# Altium PCB 电源管理.PcbDoc
Units mil, origin at the board's own origin, x right, y up, seen from the top; angles counter-clockwise.
Board outline 3460 x 1175 mil, 2 copper layers (Top Layer, Bottom Layer); 65 components, 72 nets, 244 pads, 82 vias.
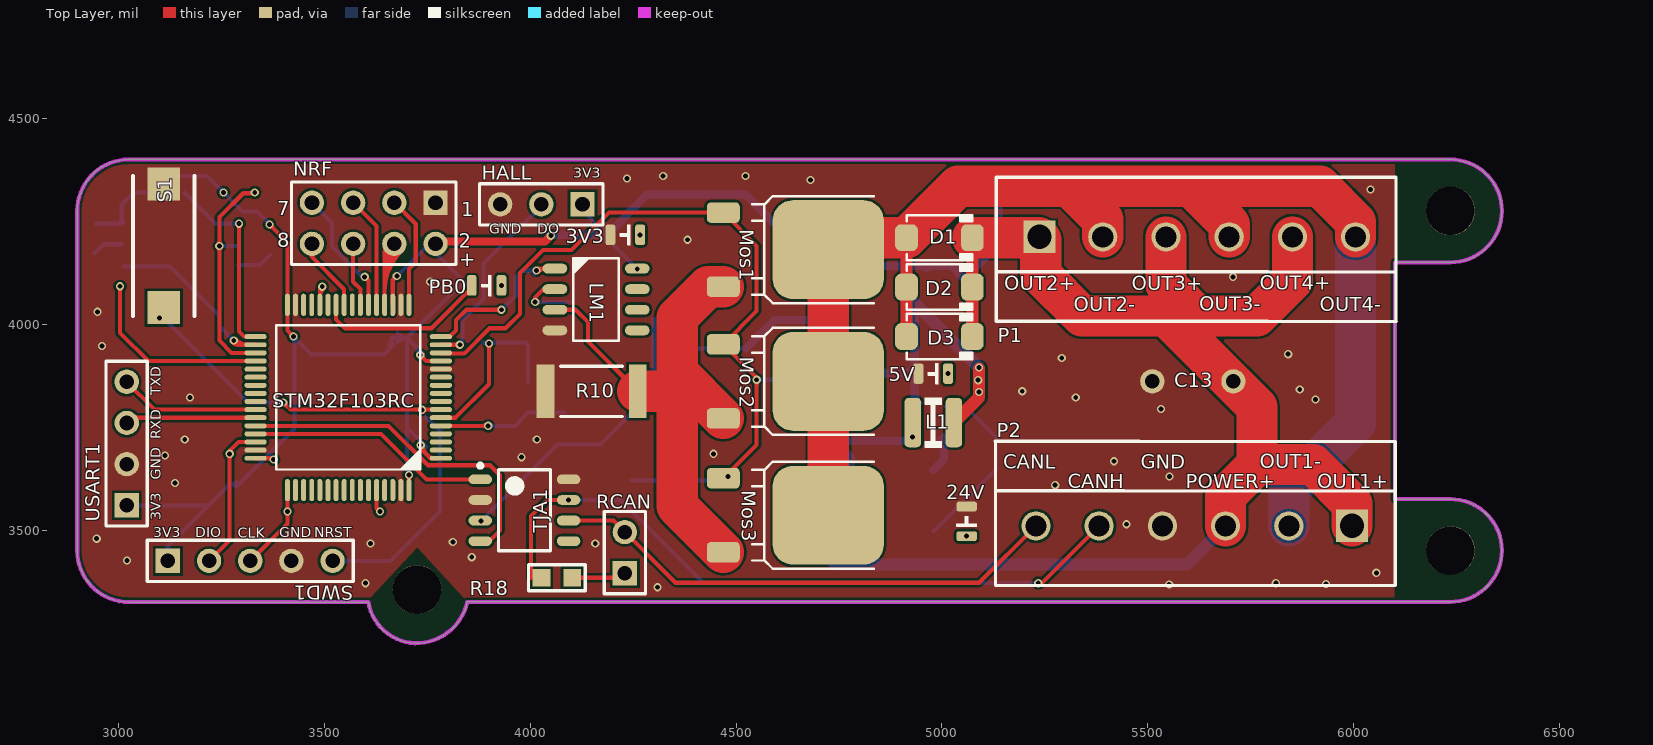
[diagram p0: Top Layer view]
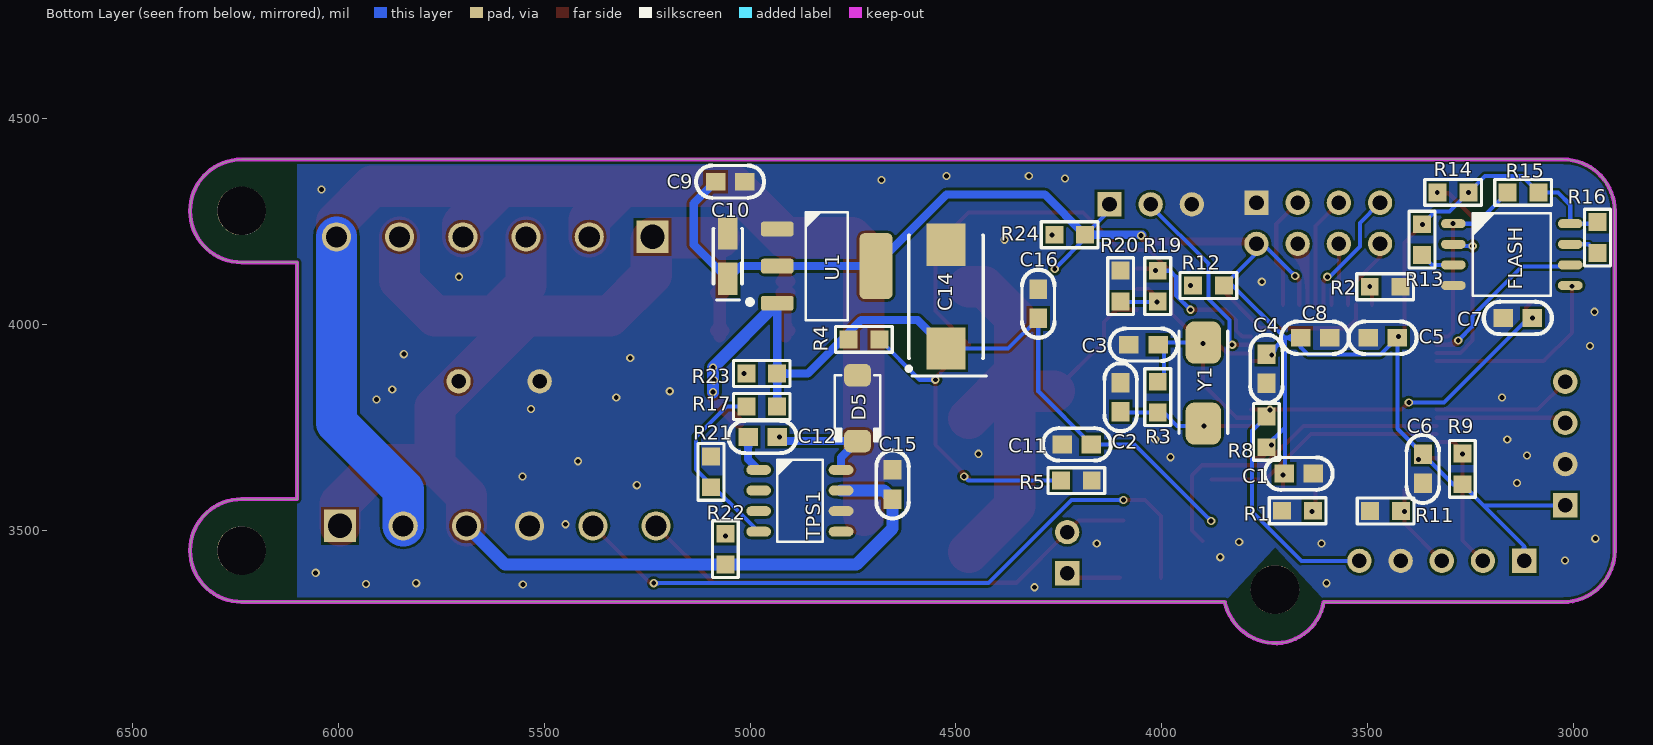
[diagram p1: Bottom Layer view, seen from below]
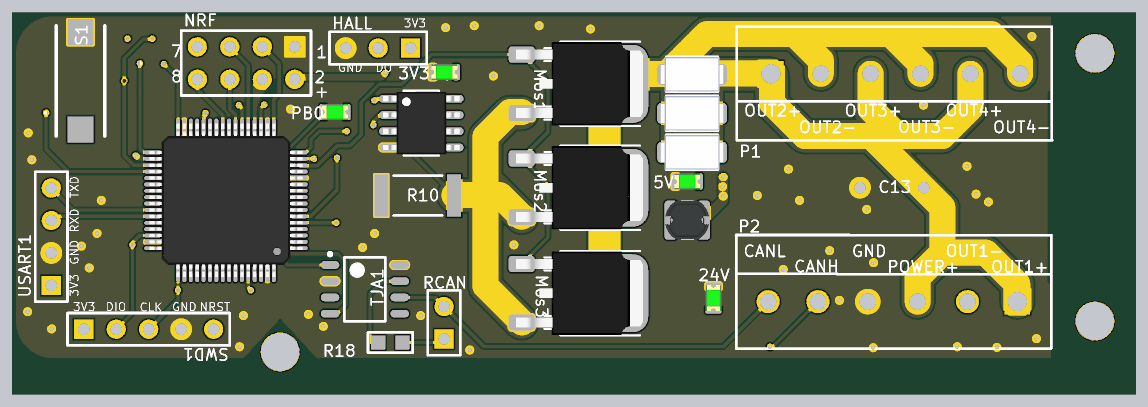
[diagram p2: 3D render of the assembled board from above, using the file's embedded part models]

## Layer stack, top to bottom
Top Layer: signal copper 1.4
Dielectric: dielectric 12.6, FR-4, Dk 4.8
Bottom Layer: signal copper 1.4

## Board outline
3025,3325 cw(c3025,3450) 2900,3450 2900,4275 cw(c3025,4275) 3025,4400 6235,4400 cw(c6235,4275) 6360,4275 cw(c6235,4275) 6235,4150 6100,4150 6100,3575 6235,3575 cw(c6235.15,3450.15) 6360,3450.31 cw(c6235.15,3450.46) 6235,3325.61 3847.16,3325.61 cw(c3722.5,3352.5) 3720,3225 3720,3225.1 cw(c3725,3345) 3606.67,3325.03 3606.51,3325

## Design rules (kind name [scope] priority, off if disabled: settings)
Clearance [All] p1: gap=6
PolygonConnect [All] p1: connectstyle=Direct reliefconductorwidth=10 reliefentries=4 polygonreliefangle="90 Angle" airgapwidth=10
RoutingVias [All] p1: holewidth=12 width=20 viastyle="Through Hole" minholewidth=12 minwidth=20 maxholewidth=150 maxwidth=150
SolderMaskExpansion [All] p1: expansion=4
Width [All] p1: maxlimit=100 minlimit=10 preferedwidth=10
28 further rules are at their usual default settings.

## Components (designator, comment, footprint, x,y, rotation, side; value= is the part's Value field where it differs from the comment)
3V3 "LED_0603" LED_0805_GREEN 4231,4217 r180 top (schematic designator D8)
5V "LED_0603" LED_0805_GREEN 4979,3880 r180 top (schematic designator D7)
24V "LED_0603" LED_0805_GREEN 5060,3521 r90 top (schematic designator D6)
C1 "Cap" CAP-MLCC-0603 3703,3637 r180 bottom
C2 "Cap" CAP-MLCC-0603 4100,3858 r270 bottom
C3 "Cap" CAP-MLCC-0603 4080,3950 r180 bottom
C4 "Cap" CAP-MLCC-0603 3746,3927 r270 bottom
C5 "Cap" CAP-MLCC-0603 3428,3967 r0 bottom
C6 "Cap" CAP-MLCC-0603 3366,3684 r270 bottom
C7 "Cap" CAP-MLCC-0603 3100,4015 r0 bottom
C8 "Cap" CAP-MLCC-0603 3663,3967 r180 bottom
C9 "Cap" CAP-MLCC-0603 5013,4346 r0 bottom
C10 "100μF" CAP-TAN-3216/CAPA 5054,4110 r270 bottom
C11 "Cap" CAP-MLCC-0603 4171,3708 r0 bottom
C12 "Cap" CAP-MLCC-0603 4934,3726 r0 bottom
C13 "100μF" C5 5708,3861 r180 top
C14 "220μF" CAP-TAN-7343/CAPD 4524,3941 r90 bottom
C15 "Cap" CAP-MLCC-0603 4654,3646 r270 bottom
C16 "Cap" CAP-MLCC-0603 4300,4085 r270 bottom
D1 "SS34" DO-214AC 4994,4210 r0 top
D2 "SS34" DO-214AC 4994,4090 r0 top
D3 "SS34" DO-214AC 4994,3970 r0 top
D5 "SS34" DO-214AC 4739,3796 r270 bottom
FLASH "SST25VF064" SOIC_E200_8 3150,4169 r180 bottom
HALL "Header 3" HDR1X3 4127,4291 r180 top
L1 "Inductor" IND_CD32 4979,3761 r0 top
LM1 "LM358" SOP_E150_8 4160,4060 r0 top
Mos1 "MOSFET N" TO-252AA 4469,4271 r270 top
Mos2 "MOSFET N" TO-252AA 4469,3951 r270 top
Mos3 "MOSFET N" TO-252AA 4469,3626 r270 top
NRF "NRF24L01" HDR2X4 3770,4295 r180 top
P1 "GREEN6" Green_6P 5312,4307 r0 top
P2 "GREEN6" Green_6P 5921,3415 r180 top
PB0 "LED_0603" LED_0805_GREEN 3894,4094 r180 top (schematic designator D4)
R1 "Res_0603" RES-0603 3633,3547 r0 bottom
R2 "Res_0603" RES-0603 3495,4091 r180 bottom
R3 "Res_0603" RES-0603 4010,3860 r270 bottom
R4 "Res_0603" RES-0603 4686,3963 r0 bottom
R5 "Res_0603" RES-0603 4170,3620 r0 bottom
R8 "Res_0603" RES-0603 3746,3776 r270 bottom
R9 "Res_0603" RES-0603 3270,3686 r270 bottom
R10 "Res_0603" RESC6332 4149,3837 r0 top
R11 "Res_0603" RES-0603 3494,3546 r180 bottom
R12 "Res_0603" RES-0603 3924,4094 r180 bottom
R13 "Res_0603" RES-0603 3368,4168 r90 bottom
R14 "Res_0603" RES-0603 3330,4320 r180 bottom
R15 "Res_0603" RES-0603 3160,4320 r180 bottom
R16 "Res_0603" RES-0603 2942,4173 r90 bottom
R17 "Res_0603" RES-0603 5009,3800 r180 bottom
R18 "Res_0603" RES-0603 4102,3384 r180 top
R19 "Res_0603" RES-0603 4010,4055 r90 bottom
R20 "Res_0603" RES-0603 4100,4130 r270 bottom
R21 "Res_0603" RES-0603 5095,3604 r90 bottom
R22 "Res_0603" RES-0603 5060,3491 r270 bottom
R23 "Res_0603" RES-0603 5009,3880 r180 bottom
R24 "Res_0603" RES-0603 4261,4217 r180 bottom
RCAN "" HDR1X2 4230,3395 r90 top
S1 "SW-PB" KEY_SMD 3105,4195 r90 top
STM32F103RC "STM32F103RC" LQFP_P0.5_64 3558,3822 r180 top
SWD1 "Header 5" HDR1X5 3120,3425 r0 top
TJA1 "TJA1050" TJA1050 3986,3548 r0 top
TPS1 "TPS54300" SOP_E150_8 4879,3571 r180 bottom
U1 "AMS1117" SOT223-3 4814,4141 r270 bottom
USART1 "Header 4" HDR1X4 3020,3560 r90 top
Y1 "8M" Osc-6032 3899,3857 r270 bottom

## Footprints (in the part's own frame and the unit in brackets; to place one, negate y for a bottom-side part, rotate by r counter-clockwise, add the part's x,y. Pads: shape width x height; smd on the part's side, far side on the other; paste and mask are expansions set on the pad)
C5 [mm]
  round 1.5 hole 0.9: 1(0,0) 2(5,0)
CAP-MLCC-0603 [mm]
  rect 1.2x1.1 smd: 1(0,0) 2(1.8,0)
  silkscreen extent -1.2,-1 3,1, body extent 0.02,-0.48 1.77,0.47, height 0.85
CAP-TAN-3216/CAPA [mm]
  rect 2x1.2 smd: 1(0,0) 2(-2.8,0)
  silkscreen extent -3.1,-0.9 1.45,1.37
CAP-TAN-7343/CAPD [mm]
  rect 2.6x2.4 smd: 1(0,0) 2(6.4,0)
  silkscreen extent -1.7,-2.5 7,2.43
DO-214AC [mil] "SMA"
  rrect50% 55x65 smd: 1(-80,0) 2(80,0)
  silkscreen extent -80,-55 80,55, body extent -98,-53 98,53, height 85
Green_6P [mm]
  rect 2x2 hole 1.5: 1(-1.905,-2.413)
  round 1.8 hole 1.3: 2(1.995,-2.413) 3(5.895,-2.413) 4(9.795,-2.413) 5(13.695,-2.413) 6(17.595,-2.413)
  silkscreen extent -4.57,-7.63 20.12,1.27
HDR1X2 [mm] "Connector; Header; 2 Position"
  rect 1.5x1.5 hole 0.9: 1(0,0)
  round 1.5 hole 0.9: 2(2.54,0)
  silkscreen extent -1.27,-1.27 3.81,1.27
HDR1X3 [mm] "Connector; Header; 3 Position"
  rect 1.5x1.5 hole 0.9: 1(0,0)
  round 1.5 hole 0.9: 2(2.54,0) 3(5.08,0)
  silkscreen extent -1.27,-1.27 6.35,1.27
HDR1X4 [mm] "Connector; Header; 4 Position"
  rect 1.5x1.5 hole 0.9: 1(0,0)
  round 1.5 hole 0.9: 2(2.54,0) 3(5.08,0) 4(7.62,0)
  silkscreen extent -1.27,-1.27 8.89,1.27
HDR1X5 [mm] "Connector; Header; 5 Position"
  rect 1.5x1.5 hole 0.9: 1(0,0)
  round 1.5 hole 0.9: 2(2.54,0) 3(5.08,0) 4(7.62,0) 5(10.16,0)
  silkscreen extent -1.27,-1.27 11.43,1.27
HDR2X4 [mm] "Connector; Header; 4x2 Position"
  rect 1.5x1.5 hole 0.9: 1(0,0)
  round 1.5 hole 0.9: 2(0,2.54) 3(2.54,0) 4(2.54,2.54) 5(5.08,0) 6(5.08,2.54) 7(7.62,0) 8(7.62,2.54)
  silkscreen extent -1.27,-1.27 8.89,3.81
IND_CD32 [mil]
  rrect50% 40x120 smd: 1(-50,0) 2(50,0)
  silkscreen extent -20,-60 20,60, body extent -68,-59 68,59, height 83
KEY_SMD [mil]
  rect 80x80 smd: 1(-155,-5) 2(145,-5)
  silkscreen extent -175,-80 165,70
LED_0805_GREEN [mil]
  rrect50% 24x50 smd: 1(-36,0) 2(36,0)
  silkscreen extent -12,-24 12,24, body extent -40,-25 40,25, height 43
LQFP_P0.5_64 [mil]
  oval 54x12 smd: 1(-225,147.64) 2(-225,127.95) 3(-225,108.27) 4(-225,88.58) 5(-225,68.9) 6(-225,49.21) 7(-225,29.53) 8(-225,9.84) 9(-225,-9.84) 10(-225,-29.53) 11(-225,-49.21) 12(-225,-68.9) 13(-225,-88.58) 14(-225,-108.27) 15(-225,-127.95) 16(-225,-147.64) 33(225,-147.64) 34(225,-127.95) 35(225,-108.27) 36(225,-88.58) 37(225,-68.9) 38(225,-49.21) 39(225,-29.53) 40(225,-9.84) 41(225,9.84) 42(225,29.53) 43(225,49.21) 44(225,68.9) 45(225,88.58) 46(225,108.27) 47(225,127.95) 48(225,147.64)
  oval 12x54 smd: 17(-147.64,-225) 18(-127.95,-225) 19(-108.27,-225) 20(-88.58,-225) 21(-68.9,-225) 22(-49.21,-225) 23(-29.53,-225) 24(-9.84,-225) 25(9.84,-225) 26(29.53,-225) 27(49.21,-225) 28(68.9,-225) 29(88.58,-225) 30(108.27,-225) 31(127.95,-225) 32(147.64,-225) 49(147.64,225) 50(127.95,225) 51(108.27,225) 52(88.58,225) 53(68.9,225) 54(49.21,225) 55(29.53,225) 56(9.84,225) 57(-9.84,225) 58(-29.53,225) 59(-49.21,225) 60(-68.9,225) 61(-88.58,225) 62(-108.27,225) 63(-127.95,225) 64(-147.64,225)
  silkscreen extent -175,-175 175,175, body extent -236,-236 236,236, height 59
Osc-6032 [mm]
  rrect50% 2.6x2.2 smd: 1(-2.5,0) 2(2.5,0)
  silkscreen extent -3.2,-1.5 3.1,1.5
RES-0603 [mm]
  rect 1.1x1.1 smd: 1(0,0) 2(1.9,0)
  silkscreen extent -0.8,-0.8 2.7,0.8, body extent 0.1,-0.48 1.8,0.47, height 0.6
RESC6332 [mm] "Chip Resistor, Body 6.3x3.2mm, IPC High Density"
  rect 1.1x3.3 smd: 1(-2.85,0) 2(2.85,0)
  silkscreen extent -1.9,-1.55 1.9,1.55, body extent -3.22,-1.68 3.22,1.68, height 0.9
SOIC_E200_8 [mil]
  oval 60x22 smd: 1(-142,75) 2(-142,25) 3(-142,-25) 4(-142,-75) 5(142,-75) 6(142,-25) 7(142,25) 8(142,75)
  silkscreen extent -95,-100 95,100, body extent -161,-106 161,106, height 84
SOP_E150_8 [mil]
  oval 60x24 smd: 1(-100,75) 2(-100,25) 3(-100,-25) 4(-100,-75) 5(100,-75) 6(100,-25) 7(100,25) 8(100,75)
  silkscreen extent -55,-100 55,100, body extent -118,-96 118,96, height 69
SOT223-3 [mil]
  rrect40% 36x80 smd: 1(-90.16,-120) 2(0,-120) 3(90.16,-120)
  rrect30% 160x80 smd: 4(0,120)
  silkscreen extent -131,-51 131,51, body extent -132,-144 132,144, height 71
TJA1050 [mm] "SOIC, 8-Leads, Body 4.90x3.90mm, Pitch 1.27mm, IPC Medium Density"
  oval 1.45x0.6 smd: 1(-2.725,1.905) 2(-2.725,0.635) 3(-2.725,-0.635) 4(-2.725,-1.905) 5(2.725,-1.905) 6(2.725,-0.635) 7(2.725,0.635) 8(2.725,1.905)
  silkscreen extent -2.85,-2.5 1.6,2.88, body extent -2,-2.5 2,2.5, height 1.75
TO-252AA [mil]
  rrect40% 50x80 smd: 1(0,0) 3(180,0)
  rrect40% 240x270 smd: 4(90,255)
  silkscreen extent -40,70 220,365, body extent -39,-17 219,374, height 91

## Part data
3V3 5V 24V PB0: "LED"
C1 C2 C3 C4 C5 C6 C8: library part Cap_1, "Capacitor"
C7 C9 C11 C12 C15 C16: "Capacitor"
C10 C13 C14: library part CAP-TAN, "钽电容"
D1 D2 D3 D5: library part DIODE-Schottky, "肖特基二极管"
FLASH LM1: library part Component_1
HALL: "Header, 3-Pin"
Mos1 Mos2 Mos3: "MOS SOT23"
NRF: library part MHDR2X4, "Header, 4-Pin, Dual row"
P1 P2: library part "Header 6", "Header, 6-Pin"
R1 R2 R3 R4 R5 R8 R9 R10 R11 R12 R13 R14 R15 R16 R17 R18 R19 R20 R21 R22 R23 R24: "Resistor"
RCAN: library part "Header 2", "Header, 2-Pin"
S1: "按钮"
STM32F103RC: "MCU"
SWD1: "Header, 5-Pin"
TJA1: "CAN总线收发器"
U1: library part AMS１１１７
USART1: "Header, 4-Pin"
Y1: library part C-Osc, "Crystal Oscillator"

## Free pads (board coordinates)
  round 118.11 hole 118.11: 7(6235,4275) 8(6235,3450) 9(3725,3355)

## Via types
v1: diameter 20, hole 12, Top Layer to Bottom Layer, 80 vias
v2: diameter 20, hole 12, Top Layer to Bottom Layer, tented bottom, 1 vias
v3: diameter 20, hole 12, Top Layer to Bottom Layer, tented top, 1 vias

## Nets (pads, with @x,y where several pads share a name; then routed paths per layer and width w, separated by ;. In a path a pad name is that pad's centre, name@x,y a point inside that pad or via, vN(x,y) a via of type N, cw(c..) or ccw(c..) an arc to the next point about the centre after c; other vN are vias at no path point)
3V3: C1.1 C4.1 C5.1 C6.1 C8.1 C9.2 C10.1 FLASH.8 HALL.1 LM1.8 NRF.2 R8.2 R9.2 R12.2 R13.2 R14.2 R15.2 R16.2 R24.2 STM32F103RC.1 STM32F103RC.13 STM32F103RC.19 STM32F103RC.32 STM32F103RC.48 STM32F103RC.64 SWD1.1 U1.2 U1.4 USART1.1 | length 5744
  Top Layer w10: STM32F103RC.48 3373.64,3674.36 v1(3377,3671) ; v1@3367,4237 cw(c3367,4224.93) 3375.54,4233.46 cw(c3384.07,4242) v1@3372,4242 ; v1(3367,4242) 3410.36,4198.64 STM32F103RC.32 3410.36,3984.64 v1(3425,3970) ; v1@3420,3970 ccw(c3407.93,3970) 3416.46,3978.54 ccw(c3425,3987.07) v1@3425,3975 ; STM32F103RC.19 3666.27,4107.27 v1(3676,4117) ; v1@3671,4117 cw(c3658.93,4117) 3667.46,4108.46 cw(c3676,4099.93) v1@3676,4112 ; v1@3702.1,3630.1 cw(c3693.57,3621.57) 3705.64,3621.57 cw(c3717.71,3621.57) v1@3709.17,3630.1 ; STM32F103RC.64 v1(3705.64,3633.64) ; v1@3733,3920 cw(c3733,3907.93) 3741.54,3916.46 cw(c3750.07,3925) v1@3738,3925 ; v1(3733,3925) 3747.42,3910.58 STM32F103RC.13 ; v1(3734,3706) 3734,3698.01 3757.64,3674.36 STM32F103RC.1 ; v1@3739,3706 ccw(c3770.37,3706) 3748.19,3683.82 ; 3752.86,3679.15 ccw(c3762,3688.29) STM32F103RC.1@3762,3675.36
  Top Layer w20: NRF.2 3776,4201 4036,4201 v1(4050,4215)
  Bottom Layer w10: R16.2@2945.8,4244 FLASH.8 3008,4290 3038,4320 R15.2 3125.2,4360 3215.2,4360 R14.2 3301.2,4274 3336.8,4274 R13.2 ; FLASH.8@3003.76,4248.24 ccw(c2993.51,4258.49) 3008,4258.49 ccw(c3022.49,4258.49) FLASH.8@3012.24,4248.24 ; USART1.1 3218.8,3560 ; SWD1.1@3110.91,3447.78 ccw(c3105.56,3461.2) 3120,3461.2 ; SWD1.1 3120,3461.2 ; SWD1.1@3129.09,3447.78 cw(c3134.44,3461.2) 3120,3461.2 ; R14.2@3246.33,4328.87 cw(c3237.45,4320) R14.2@3250,4320 ; R14.2@3246.8,4328.4 ccw(c3255,4336.6) R14.2@3255,4325 ; R14.2@3255,4315 cw(c3255,4302.45) R14.2@3263.87,4311.33 ; R14.2@3260,4320 ccw(c3271.6,4320) R14.2@3263.4,4311.8 ; R9.2@3285.78,3605.87 cw(c3293.2,3603.37) 3293.2,3611.2 ; R9.2@3285.78,3616.52 ccw(c3293.2,3619.02) 3293.2,3611.2 ; R13.2@3357.19,4253.61 cw(c3345.58,4242) R13.2@3362,4242 ; C5.1@3421.46,3966.46 cw(c3405.69,3950.69) C5.1@3428,3950.69 ; C5.1@3425,3965 cw(c3425,3952.93) 3433.54,3961.46 cw(c3442.07,3970) C5.1@3430,3970 ; C8.1@3657.8,3951.18 cw(c3655.45,3944) 3663,3944 ; C8.1@3668.2,3951.18 ccw(c3670.55,3944) 3663,3944 ; v1(3676,4117) 3754,4195 NRF.2 3770,4173.2 R12.2 3828,4094 3701,3967 ; v1@3676,4122 ccw(c3676,4134.07) 3684.54,4125.54 ccw(c3693.07,4117) v1@3681,4117 ; C8.1@3677.65,3956.21 cw(c3701,3936.35) 3701,3967 ; C8.1@3677.65,3977.79 ccw(c3701,3997.65) 3701,3967 ; C1.1@3701,3639 3701,3749.2 ; C1.1@3701,3656.91 ccw(c3728.91,3656.91) C1.1@3709.17,3637.17 ; 3717.39,3950.61 cw(c3691.79,3925) C4.1@3728,3925 ; R8.2@3737.43,3702.36 cw(c3742.63,3696.83) 3748,3702.2 3701,3749.2 ; C4.1@3741,3927 3701,3967 ; HALL.1@4127,4276.2 R24.2 4186.2,4207.8 v1(4260,4134) ; v1@4255,4134 ccw(c4242.93,4134) 4251.46,4142.54 ccw(c4260,4151.07) v1@4260,4139 ; 3120,3461.2 3218.8,3560 ; 3218.8,3560 R9.2 3293.2,3611.2 ; 3293.2,3611.2 C6.1 3428,3746 C5.1 3469,3926 3645,3926 3663,3944 ; 3663,3944 C8.1 3701,3967 ; 3701,3749.2 3701,3967
  Bottom Layer w20: v1@4047,4217 R24.2 4284.2,4315 4523.02,4315 4694,4144.02 U1.4 U1.2 5023,4141 ; R24.2@4177.96,4208.76 ccw(c4158.06,4188.87) 4158.06,4217 ccw(c4158.06,4245.13) R24.2@4177.96,4225.24 ; U1.2@4906.34,4135.34 ccw(c4892.69,4121.69) 4892.69,4141 ccw(c4892.69,4160.31) U1.2@4906.34,4146.66 ; U1.2@4961.66,4135.34 cw(c4975.31,4121.69) 4975.31,4141 cw(c4975.31,4160.31) U1.2@4961.66,4146.66 ; C10.1@5047.34,4137.63 cw(c5037.4,4155.39) 5023,4141 ; C9.2 5137,4292.87 5137,4193 C10.1 5023,4141
  other v1: 3255,4320
5V: C11.1 C14.1 C16.2 L1.2 R4.2 R17.2 R23.2 TJA1.3 U1.3 | length 2387.8
  Top Layer w30: L1.2 5090,3822 v1@5090,3892
  Bottom Layer w10: v1(3880,3522) 4066,3708 C11.1 4300,3837 C16.2 4373.13,3941 C14.1 ; v1@3880,3527 ccw(c3880,3539.07) 3888.54,3530.54 ccw(c3897.07,3522) v1@3885,3522
  Bottom Layer w20: C14.1 4592.8,4009.8 4730,4009.8 4797.8,3942 4859.8,3880 R23.2 ; R17.2@4925.96,3808.24 ccw(c4906.06,3828.13) 4934.2,3828.13 ccw(c4962.33,3828.13) R17.2@4942.44,3808.24 ; U1.3@4928.34,4045.19 cw(c4914.21,4031.05) 4934.2,4031.05 ; R17.2 R23.2 ; 4934.2,4032 cw(c4952.84,4032) U1.3@4939.66,4045.19 ; U1.3@4934.2,4050.65 R23.2 ; R23.2@4942.44,3871.76 ccw(c4962.33,3851.87) 4934.2,3851.87 ccw(c4906.06,3851.87) 4925.96,3871.76 ccw(c4906.06,3851.87) 4906.06,3880 ccw(c4906.06,3908.13) 4925.96,3888.24 ccw(c4906.06,3908.13) 4934.2,3908.13 ccw(c4962.33,3908.13) R23.2@4942.44,3888.24
  Bottom Layer w30: U1.3 4934.2,4050.65 v1(5090,3894.84) v1(5090,3835)
  other v1: 5088,3864
ADC2: LM1.1 R19.2 STM32F103RC.16 | length 469.9
  Top Layer w10: STM32F103RC.16 3804.64,3969.64 3820,3985 3820,4010 3845,4035 v1(3930,4035) ; v1@3926.46,4031.46 ccw(c3917.93,4022.93) 3917.93,4035 ccw(c3917.93,4047.07) v1@3926.46,4038.54 ; v1(4015,4130) 4020,4135 LM1.1 ; v1@4018.54,4126.46 cw(c4039.14,4105.86) LM1.1@4039.14,4135
  Bottom Layer w10: v1(3930,4035) 3965,4070 3965,4115 3979.8,4129.8 R19.2 R19.2@4010,4121.14 ; v1@3930,4040 ccw(c3930,4052.07) 3938.54,4043.54 ccw(c3947.07,4035) v1@3935,4035 ; R19.2@4002.45,4129.8 ccw(c4002.45,4142.55) R19.2@4011.46,4133.54 ; R19.2@4003.4,4129.8 cw(c4003.4,4118.4) R19.2@4011.46,4126.46
BOOT0: R1.1 STM32F103RC.60 | length 72.8
  Top Layer w10: STM32F103RC.60 3626.9,3553.1 ; v1@3630,3545.19 ccw(c3619.38,3545.59) 3626.9,3553.1 ; v1@3634.81,3550 cw(c3634.41,3560.62) 3626.9,3553.1 ; v1(3635,3545) 3626.9,3553.1
BOOT1: R2.1 STM32F103RC.28 | length 71.7
  Top Layer w10: STM32F103RC.28 3489.1,4085.1 v1(3495,4091) ; STM32F103RC.28@3489.1,4064.69 cw(c3521.31,4064.69) v1@3498.54,4087.46
CAN_H: P2.5 R18.2 TJA1.7 | length 1745.1
  Top Layer w10: 4002,3384 4002,3534 4041,3573 v1(4093.28,3573) ; TJA1.7@4089.75,3569.46 ccw(c4081.21,3560.93) 4081.21,3573 ccw(c4081.21,3585.07) TJA1.7@4089.75,3576.54 ; v1(5234,3371) 5242.83,3371 P2.5
  Bottom Layer w10: v1(4093.28,3573) 4219,3573 4421,3371 v1(5234,3371) v1@5235,3371 ; v1@4096.82,3569.46 cw(c4105.35,3560.93) 4105.35,3573 cw(c4105.35,3585.07) v1@4096.82,3576.54 ; v1@5230.46,3367.46 ccw(c5221.93,3358.93) 5221.93,3371 ccw(c5221.93,3383.07) v1@5230.46,3374.54
CAN_L: P2.6 RCAN.2 TJA1.6 | length 1254.7
  Top Layer w10: TJA1.6 4202,3523 RCAN.2 4353,3372 5090.28,3372 P2.6
CAN_RX: STM32F103RC.44 TJA1.4 | length 814.5
  Top Layer w10: STM32F103RC.44 3656.28,3753.1 3752.02,3657.36 3902.64,3657.36 3927,3633 3927,3499 TJA1.4@3901,3473
CAN_TX: STM32F103RC.45 TJA1.1 | length 591.5
  Top Layer w10: STM32F103RC.45 3637.58,3733.42 3748,3623 TJA1.1
DO: HALL.2 STM32F103RC.15 | length 484
  Top Layer w10: STM32F103RC.15 v1(3829,3950) v1(3829,3950) ; 3816.81,3949.95 ccw(c3816.81,3962.19) v1@3825.46,3953.54 ; 3817.04,3949.95 cw(c3817.04,3938.04) v1@3825.46,3946.46
  Bottom Layer w10: v1(3829,3950) 3836,3957 3836,4010 3887,4061 3887,4147 HALL.2@4027,4287
GND: 3V3.2 5V.2 24V.2 C1.2 C2.1 C3.1 C4.2 C5.2 C6.2 C7.2 C8.2 C9.1 C10.2 C11.2 C13.2 C14.2 C15.1 C16.1 D5.1 FLASH.4 HALL.3 LM1.4 NRF.1 P2.4 R1.2 R2.2 R5.1 R10.1 R11.1 R20.1 R21.2 S1.2 STM32F103RC.12 STM32F103RC.18 STM32F103RC.31 STM32F103RC.47 STM32F103RC.63 SWD1.4 TJA1.2 TJA1.8 TPS1.6 U1.1 USART1.2
  other v1: 4309,3361 5552,3368 5933,3369 3600,3371 5811,3371 6055,3396 3021,3426 3858,3434 3612,3467 4158,3467 3812,3471 2947,3479 5448,3514 5275,3609 3137,3614 5553,3630 5418,3667 3979,3677 3113,3681 4445,3685 3161,3720 4016,3720 5532,3794 5907,3817 3174,3822 5325,3822 5195,3837 5869,3841 5291,3918 5841,3927 2960,3947 2949,4030 3757,4103 5707,4115 4382,4205 6041,4327 4681,4350 4235,4354 4323,4360 4523,4360
IRQAM: NRF.8 STM32F103RC.25 | length 202.9
  Top Layer w10: NRF.8@3463.63,4171.31 cw(c3461.39,4163) 3470,4163 ; NRF.8 3470,4163 ; NRF.8@3476.37,4171.31 ccw(c3478.61,4163) 3470,4163 ; STM32F103RC.25 3548.16,4084.84 3470,4163
MOTER+: C13.1 C15.2 D1.2 D2.2 D3.2 P1.1 P1.3 P1.5 P2.1 P2.3 R22.2 TPS1.7 | length 3965.5
  Top Layer w30: D3.2@5065.16,3983.84 ccw(c5043.82,4005.18) 5074,4005.18 ccw(c5104.18,4005.18) D3.2@5082.84,3983.84 ; D2.2@5065.16,4076.16 cw(c5043.82,4054.82) 5074,4054.82 cw(c5104.18,4054.82) D2.2@5082.84,4076.16 ; D2.2@5065.16,4103.84 ccw(c5043.82,4125.18) 5074,4125.18 ccw(c5104.18,4125.18) D2.2@5082.84,4103.84 ; D1.2@5065.16,4196.16 cw(c5043.82,4174.82) 5074,4174.82 cw(c5104.18,4174.82) D1.2@5082.84,4196.16 ; D3.2 D2.2 D1.2
  Top Layer w100: D1.2 P1.1@5235,4210 ; P1.1@5240,4205 5240,4120 5340,4020 5544,4020 ; P1.3 5544.09,4095.91 5620,4020 ; P2.3 5688.91,3582.91 5765,3659 ; P1.5 5851.17,4106.17 5765,4020 5620,4020 ; P2.1 5996,3564 5901,3659 5765,3659 ; 5544,4020 5620,4020 ; 5544,4020 5765,3799 5765,3659
  Bottom Layer w30: TPS1.7 4674.87,3596 C15.2 4654,3504 4741.8,3416.2 R22.2 5595.11,3416.2 P2.3
MOTER-: D1.1 D2.1 D3.1 Mos1.4 Mos2.4 Mos3.4 P1.2 P1.4 P1.6 P2.2 | length 3575.8
  Top Layer w30: D3.1@4905.16,3983.84 ccw(c4883.82,4005.18) 4914,4005.18 ccw(c4944.18,4005.18) D3.1@4922.84,3983.84 ; D2.1@4905.16,4076.16 cw(c4883.82,4054.82) 4914,4054.82 cw(c4944.18,4054.82) D2.1@4922.84,4076.16 ; D2.1@4905.16,4103.84 ccw(c4883.82,4125.18) 4914,4125.18 ccw(c4944.18,4125.18) D2.1@4922.84,4103.84 ; D1.1@4905.16,4196.16 cw(c4883.82,4174.82) 4914,4174.82 cw(c4944.18,4174.82) D1.1@4922.84,4196.16 ; D3.1 D2.1 D1.1
  Top Layer w100: Mos3.4 Mos2.4 Mos1.4 4753,4210 D1.1 5039,4335 5309,4335 ; P1.2 5390.54,4253.46 5309,4335 ; P1.4 5697.63,4242.37 5605,4335 ; P1.6 6004.72,4248.28 5918,4335 5605,4335 ; 5309,4335 5605,4335
  Bottom Layer w100: P2.2 5842.46,3598.39 6002.72,3758.65 ; 6004.72,3760.65 P1.6
Net3V3_1: 3V3.1 R24.1
  other v1: 4267,4217
Net5V_1: 5V.1 R23.1
  other v2: 5015,3880
Net24V_1: 24V.1 R22.1
  other v1: 5060,3485
NetC12_1: C12.1 D5.2 L1.1 TPS1.8 | length 293.4
  Bottom Layer w20: TPS1.8 4779,3676 D5.2 C12.1@4919,3716 ; 4904.86,3716 ccw(c4904.86,3750.14) v1(4929,3726)
NetC12_2: C12.2 TPS1.1 | length 134.9
  Bottom Layer w20: TPS1.1 5004.87,3671.87 C12.2 ; C12.2@4996.63,3717.76 cw(c4976.73,3697.87) 5004.87,3697.87 cw(c5033,3697.87) C12.2@5013.11,3717.76
NetFLASH_3: FLASH.3 R13.1 | length 85.9
  Bottom Layer w10: FLASH.3 3344,4144 R13.1
NetFLASH_7: FLASH.7 R16.1 | length 74.7
  Bottom Layer w10: R16.1 2963,4194 FLASH.7
NetLM1_2: LM1.2 R19.1 R20.2 | length 189.4
  Top Layer w10: v1@4008.71,4057.77 ccw(c4002.4,4065) 4012,4065 ; v1(4012,4054) 4012,4065 ; v1@4015.29,4057.77 cw(c4021.6,4065) 4012,4065 ; LM1.2 4032,4085 4012,4065
  Bottom Layer w10: v1(4012,4054) R20.2@4098.8,4054 ; R19.1@4015.54,4050.46 cw(c4024.07,4041.93) 4024.07,4054 cw(c4024.07,4066.07) R19.1@4015.54,4057.54
NetPB0_1: PB0.1 R12.1
  other v1: 3930,4094
NetR17_1: R17.1 R21.1 TPS1.4 | length 445.9
  Bottom Layer w10: TPS1.4 4979.53,3496 5131,3647.47 5131,3726 5057,3800 R17.1
NetR18_1: R18.1 RCAN.1 | length 132.6
  Top Layer w10: R18.1 4219,3384 RCAN.1
NRST: C7.1 R8.1 S1.1 STM32F103RC.7 SWD1.5 | length 1445.1
  Top Layer w10: S1.1@3105,4050 S1.1@3115,4040 ; v1@3400,3805 cw(c3400,3792.93) 3408.54,3801.46 cw(c3417.07,3810) v1@3405,3810 ; v1(3400,3810) 3417.53,3792.47 STM32F103RC.7@3757.47,3792.47 ; v1@3740.54,3788.46 cw(c3750.21,3778.79) 3750.21,3792.47 ; v1@3740.54,3795.54 ccw(c3747.93,3802.93) 3747.93,3792.47 ; STM32F103RC.7@3757.47,3792.3 STM32F103RC.7@3757.47,3792.47 ; STM32F103RC.7 STM32F103RC.7@3757.47,3792.47
  Bottom Layer w10: C7.1@3100,4010 cw(c3100,3973.79) 3125.61,3999.39 ; v3(3100,4015) 3100,4025 3315,3810 v1(3400,3810) ; v1@3396.46,3806.46 ccw(c3387.93,3797.93) 3387.93,3810 ccw(c3387.93,3822.07) v1@3396.46,3813.54 ; SWD1.5@3520.06,3425.06 3661.06,3425.06 3781,3545 3781,3741 R8.1
  other v1: 3737,3792
OSC32_IN: STM32F103RC.3
OSC32_OUT: STM32F103RC.4
OSCIN: C2.2 R3.2 STM32F103RC.5 Y1.2 | length 385
  Top Layer w10: STM32F103RC.5 v1(3897.9,3753.1) ; v1@3894.36,3749.57 ccw(c3885.83,3741.03) 3885.83,3753.1 ccw(c3885.83,3765.17) v1@3894.36,3756.64
  Bottom Layer w10: Y1.2@3883.1,3753.1 3962.91,3753.1 3995,3785.2 C2.2@4083.06,3785.2 ; Y1.2@3894.36,3749.57 ccw(c3885.83,3741.03) 3885.83,3753.1 ccw(c3885.83,3765.17) Y1.2@3894.36,3756.64 ; Y1.2@3901.43,3749.57 cw(c3909.97,3741.03) 3909.97,3753.1 cw(c3909.97,3765.17) Y1.2@3901.43,3756.64
OSCOUT: C3.2 R3.1 STM32F103RC.6 Y1.1 | length 497.7
  Top Layer w10: STM32F103RC.6 3818.79,3772.79 3900,3854 v1(3900,3953) ; v1@3896.46,3949.46 cw(c3887.93,3940.93) 3900,3940.93 cw(c3912.07,3940.93) v1@3903.54,3949.46
  Bottom Layer w10: Y1.1@3896.17,3949.79 ccw(c3885,3940.43) 3885,3955 3989.13,3955 3995,3949.13 R3.1@3995,3860 ; Y1.1@3903.54,3949.46 cw(c3916.9,3936.1) Y1.1@3916.9,3955
PA0: Mos1.1 Mos2.1 Mos3.1 R4.1 R5.2 STM32F103RC.14 | length 2148.7
  Top Layer w10: STM32F103RC.14@3784.32,3928.95 3839.95,3928.95 3901,3990 3940,3990 3975,4025 3975,4124 4031,4180 4100,4180 4191,4271 Mos1.1 4550,4190 4550,4032 Mos2.1 4550,3870 v1(4550,3865) 4550,3707 Mos3.1 cw(c4472.98,3622.02) Mos3.1@4476.7,3626.25 ; Mos3.1@4485,3630 cw(c4513.97,3630) Mos3.1@4493.49,3650.49 ; v1@4546.46,3861.46 cw(c4537.93,3852.93) 4550,3852.93 cw(c4562.07,3852.93) v1@4553.54,3861.46
  Bottom Layer w10: R5.2 4470,3620 v1(4480,3630) ; v1(4550,3865) 4588,3865 R4.1 ; v1@4553.54,3861.46 cw(c4562.07,3852.93) 4562.07,3865 cw(c4562.07,3877.07) v1@4553.54,3868.54
PA3: NRF.3 STM32F103RC.17 | length 276.3
  Top Layer w10: NRF.3 3722,4243 3722,4150 3705.64,4133.64 STM32F103RC.17
PA4: NRF.4 STM32F103RC.20 | length 540.3
  Top Layer w10: STM32F103RC.20 3646.58,4171.58 ; 3646.58,4079.25 cw(c3785.75,4079.25) NRF.4@3687.34,4177.66 ; 3646.58,4103.39 cw(c3761.61,4103.39) NRF.4@3680.27,4184.73 ; 3646.58,4127.54 cw(c3737.46,4127.54) NRF.4@3673.2,4191.8 ; 3646.58,4151.68 cw(c3713.32,4151.68) NRF.4@3666.13,4198.87 ; 3646.58,4175.82 cw(c3689.18,4175.82) NRF.4@3659.06,4205.94 ; NRF.4@3648.35,4183.47 cw(c3639.45,4178.72) 3646.58,4171.58 ; NRF.4@3658.47,4173.35 ccw(c3653.72,4164.45) 3646.58,4171.58 ; NRF.4 3646.58,4171.58
PA5: NRF.5 STM32F103RC.21 | length 271.6
  Top Layer w10: NRF.5 3626.9,4238.1 STM32F103RC.21
PA6: NRF.7 STM32F103RC.22 | length 326.9
  Top Layer w10: v1@3598,4110 cw(c3598,4097.93) 3606.54,4106.46 cw(c3615.07,4115) v1@3603,4115 ; v1(3598,4115) 3607.21,4105.79 STM32F103RC.22
  Bottom Layer w10: NRF.7 3519,4246 3519,4188.69 3592.69,4115 v1(3598,4115)
PA7: NRF.6 STM32F103RC.23 | length 155.3
  Top Layer w10: NRF.6 3570,4103 3587.53,4085.47 STM32F103RC.23
PA8: STM32F103RC.41
PA9: STM32F103RC.42 USART1.4 | length 341
  Top Layer w10: USART1.4 3087.53,3792.47 STM32F103RC.42
PA10: STM32F103RC.43 USART1.3 | length 318.3
  Top Layer w10: USART1.3 3032.79,3772.79 STM32F103RC.43
PA13: R9.1 STM32F103RC.46 SWD1.2 | length 378.9
  Top Layer w10: SWD1.2 3270,3475 v1(3270,3685) 3270,3692.46 3291.27,3713.73 STM32F103RC.46 ; v1@3266.46,3681.46 cw(c3257.93,3672.93) 3270,3672.93 cw(c3282.07,3672.93) v1@3273.54,3681.46
PA14: R11.2 STM32F103RC.49 SWD1.3 | length 247.4
  Top Layer w10: SWD1.3 3410.36,3515.36 STM32F103RC.49 ; v1@3406.83,3541.46 cw(c3398.29,3532.93) 3410.36,3532.93 cw(c3422.43,3532.93) v1@3413.9,3541.46 ; v1@3406.83,3548.54 ccw(c3398.29,3557.07) 3410.36,3557.07 ccw(c3422.43,3557.07) v1@3413.9,3548.54
  other v1: 3410.36,3545
PA15: STM32F103RC.50
PB0: PB0.2 STM32F103RC.26 | length 423
  Top Layer w10: STM32F103RC.26 3528.47,4011.53 3550,3990 3760,3990 PB0.2@3864,4094
PB1: STM32F103RC.27
PB3: STM32F103RC.55
PB4: STM32F103RC.56
PB5: STM32F103RC.57
PB6: STM32F103RC.58
PB7: STM32F103RC.59
PB8: STM32F103RC.61
PB9: STM32F103RC.62
PB10: STM32F103RC.29
PB11: STM32F103RC.30
PC0: STM32F103RC.8
PC1: STM32F103RC.9
PC2: STM32F103RC.10
PC3: STM32F103RC.11
PC4: STM32F103RC.24
PC6: STM32F103RC.37
PC7: STM32F103RC.38
PC8: STM32F103RC.39
PC9: STM32F103RC.40
PC10: STM32F103RC.51
PC11: STM32F103RC.52
PC12: STM32F103RC.53
PC13: STM32F103RC.2
PD2: STM32F103RC.54
SPI2_MISO: FLASH.2 R14.1 STM32F103RC.35 | length 608.2
  Top Layer w10: v1@3241.46,4186.46 cw(c3232.93,4177.93) 3245,4177.93 cw(c3257.07,4177.93) v1@3248.54,4186.46 ; v1@3241.46,4193.54 ccw(c3232.93,4202.07) 3245,4202.07 ccw(c3257.07,4202.07) v1@3248.54,4193.54 ; v1@3329,4318 3303,4318 3245,4260 v1(3245,4190) 3245,3960 3274.73,3930.27 STM32F103RC.35
  Bottom Layer w10: v1(3245,4190) FLASH.2@3288,4190 ; v1@3248.54,4186.46 cw(c3257.07,4177.93) 3257.07,4190 cw(c3257.07,4202.07) v1@3248.54,4193.54
  other v1: 3331,4320
SPI2_MOSI: FLASH.5 STM32F103RC.36 | length 489.3
  Top Layer w10: v1@3000.46,4088.46 cw(c2991.93,4079.93) 3004,4079.93 cw(c3016.07,4079.93) v1@3007.54,4088.46 ; v1(3004,4092) 3004,3979 3072.42,3910.58 STM32F103RC.36
SPI2_NSS: FLASH.1 R15.1 STM32F103RC.33 | length 508.5
  Top Layer w10: v1@3289.46,4240.46 cw(c3280.93,4231.93) 3293,4231.93 cw(c3305.07,4231.93) v1@3296.54,4240.46 ; v1(3293,4244) 3293,3982 3305.36,3969.64 STM32F103RC.33
  Bottom Layer w10: R15.1 3236,4244 FLASH.1 ; FLASH.1@3289.46,4240.46 ccw(c3280.93,4231.93) 3280.93,4244 ccw(c3280.93,4256.07) FLASH.1@3289.46,4247.54
SPI2_SCK: FLASH.6 STM32F103RC.34 | length 506.2
  Top Layer w10: v1@3276.46,3956.46 ccw(c3292.18,3972.18) 3292.18,3949.95 ; v1@3280,3955 cw(c3280,3942.93) 3288.54,3951.46 cw(c3297.07,3960) v1@3285,3960 ; v1(3280,3960) 3290.05,3949.95 STM32F103RC.34 ; v1@3283.54,3963.54 ccw(c3316.33,3996.33) STM32F103RC.34@3316.33,3949.95
  Bottom Layer w10: FLASH.6@3012,4140 3125,4140 3245,4020 3245,3995 v1(3280,3960) ; v1@3275,3960 ccw(c3262.93,3960) 3271.46,3968.54 ccw(c3280,3977.07) v1@3280,3965
VOLT: LM1.3 Mos1.3 Mos2.3 Mos3.3 R10.2 | length 1278.3
  Top Layer w10: LM1.3 4110,4035 4140,4005 4140,3958.2 R10.2
  Top Layer w100: R10.2 4311,3837 ; Mos3.3 4357,3558 4357,3883 ; Mos2.3 4357,3883 ; Mos1.3 4432,4091 4357,4016 4357,3883
pads on no net: LM1.5 LM1.6 LM1.7 TJA1.5 TPS1.2 TPS1.3 TPS1.5

## Polygon pours and split planes (outlines as drawn)
GND on Bottom Layer "Bottom Layer-No Net" (solid, remove dead copper, pour order 4): 2551.77,2996.08 6521.77,2996.08 6609.77,2908.08 6547.77,2970.08 6547.77,4767.08 2597.77,4767.08 2532.77,4702.08
GND on Top Layer "Bottom Layer-No Net" (solid, remove dead copper, pour order 6): 2461.63,2897.13 2491.63,2927.13 2491.63,4815.13 6648.63,4815.13 6769.63,4694.13 6668.63,4593.13 6668.63,2851.13

## Keep-outs
Keep-Out Layer:
  lines w10: 3606.51,3325 3025,3325 cw(c3025,3450) 2900,3450 2900,4275 cw(c3025,4275) 3025,4400 6235,4400 cw(c6235,4275) 6360,4275 cw(c6235,4275) 6235,4150 6100,4150 6100,3575 6235,3575 cw(c6235.15,3450.15) 6360,3450.31 cw(c6235.15,3450.46) 6235,3325.61 3847.16,3325.61 cw(c3722.5,3352.5) 3720,3225 ; 3606.67,3325.03 ccw(c3725,3345) 3720,3225.1

## Other copper
Top Layer:
  pour cut-out: 3599,3304 3601,3316 3606.51,3330.17 3725.37,3457.85 3868,3304 3847.16,3156.84 3870,3134 3856,3120 3568,3120
  pour cut-out: 6100,4150 6100,4653 6155,4598 6490,4598 6490,4168 6634,4024
  pour cut-out: 6100,3575 6099,3574 6099,3248 6432,3248 6581,3397 6581,3705
Bottom Layer:
  pour cut-out: 6100,3575 6100,3209 6507,3209 6615,3317 6615,3648
  pour cut-out: 6100,4150 6100,4652 6438,4652 6615,4475 6615,4022
  pour cut-out: 3603.51,3327.51 3725,3458 3728,3455 3865,3307.28 3865,3158.51 3613,3158.51 3563,3108.51

## Silkscreen, mask and mechanical layers (free items; w line width, h text height)
Top Overlay:
  text "3V3" at 4104,4356 h25
  text "GND" at 3901,4219 h25
  text "DO" at 4017,4219 h25
  text "+" at 3828,4141 h35
  text "OUT4+" at 5772,4083 h35
  text "OUT2+" at 5151,4082 h35
  text "OUT3+" at 5461,4082 h35
  text "OUT3-" at 5625,4032 h35
  text "OUT2-" at 5320,4031 h35
  text "OUT4-" at 5918,4031 h35
  text "TXD" at 3103,3827 h25 r90
  text "RXD" at 3103,3721 h25 r90
  text "OUT1-" at 5772,3650 h35
  text "CANL" at 5149,3649 h35
  text "GND" at 5483,3649 h35
  text "GND" at 3103,3622 h25 r90
  text "CANH" at 5305,3602 h35
  text "POWER+" at 5592,3601 h35
  text "OUT1+" at 5912,3601 h35
  text "3V3" at 3103,3524 h25 r90
  text "3V3" at 3085,3482 h25
  text "DIO" at 3186,3482 h25
  text "GND" at 3390,3482 h25
  text "NRST" at 3475,3482 h25
  text "CLK" at 3290,3481 h25
Top Solder:
  lines w80: 4262,3838 4402,3838 4468,3772 4470,3772 ; 4469,4094 4433,4094 4357,4018 4357,3559 4470,3446 ; 4772,4212 4917,4212 5039,4334 5310,4334 ; 5071,4213 5236,4213 5240,4209 5240,4122 5342,4020 5765,4020 5851.17,4106.17 5851.17,4212 ; 5390.54,4212 5390.54,4253.46 5310,4334 ; 5544.09,4212 5544.09,4103.91 5621,4027 ; 5547,4020 5547,4019 5765,3801 5765,3661 ; 5688.91,3510 5688.91,3584.91 5765,3661 ; 5697.63,4212 5697.63,4242.37 5606,4334 ; 5996,3510 5996,3564 5899,3661 5765,3661 ; 6004.72,4212 6004.72,4246.28 5917,4334 5606,4334 ; 5310,4334 5606,4334
  lines w100: 4725,3578 4725,4102
Bottom Solder:
  lines w80: 5842.46,3510 5842.46,3597.46 6004.72,3759.72 6004.72,4212

## Text inside footprints (layer, text, board x,y; h text height)
NRF: Top Overlay "2" at 3827,4185 h35; Top Overlay "1" at 3833,4262 h35; Top Overlay "7" at 3386,4265 h35; Top Overlay "8" at 3386,4187 h35